# Altium PCB nest_jtag_serial.PcbDoc
Units mil, origin at the board's own origin, x right, y up, seen from the top; angles counter-clockwise.
Board outline 2025 x 2210 mil, 2 copper layers (Top Layer, Bottom Layer); 7 components, 18 nets, 94 pads, 58 vias.
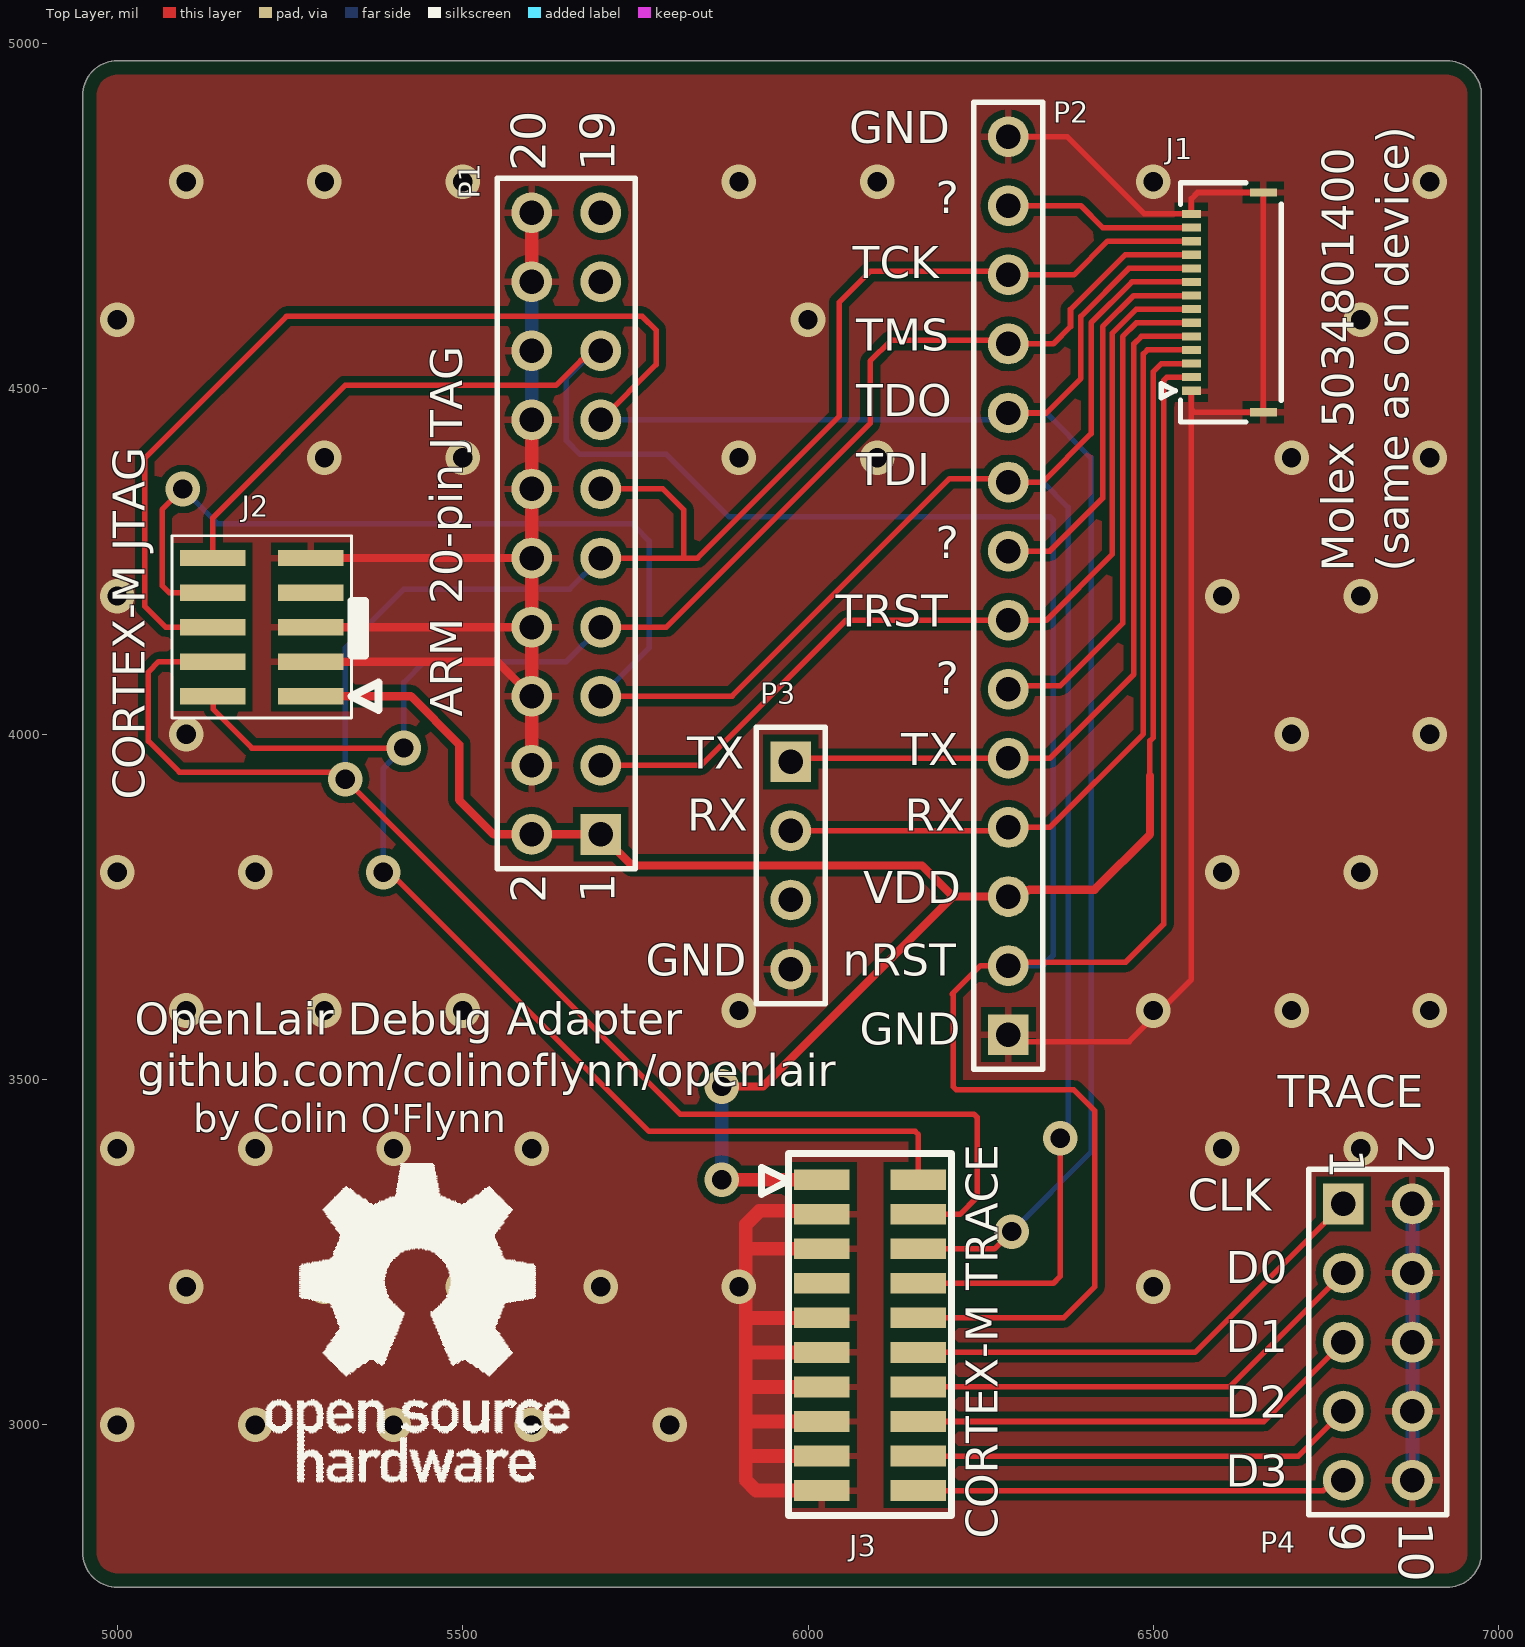
[diagram p0: Top Layer view]
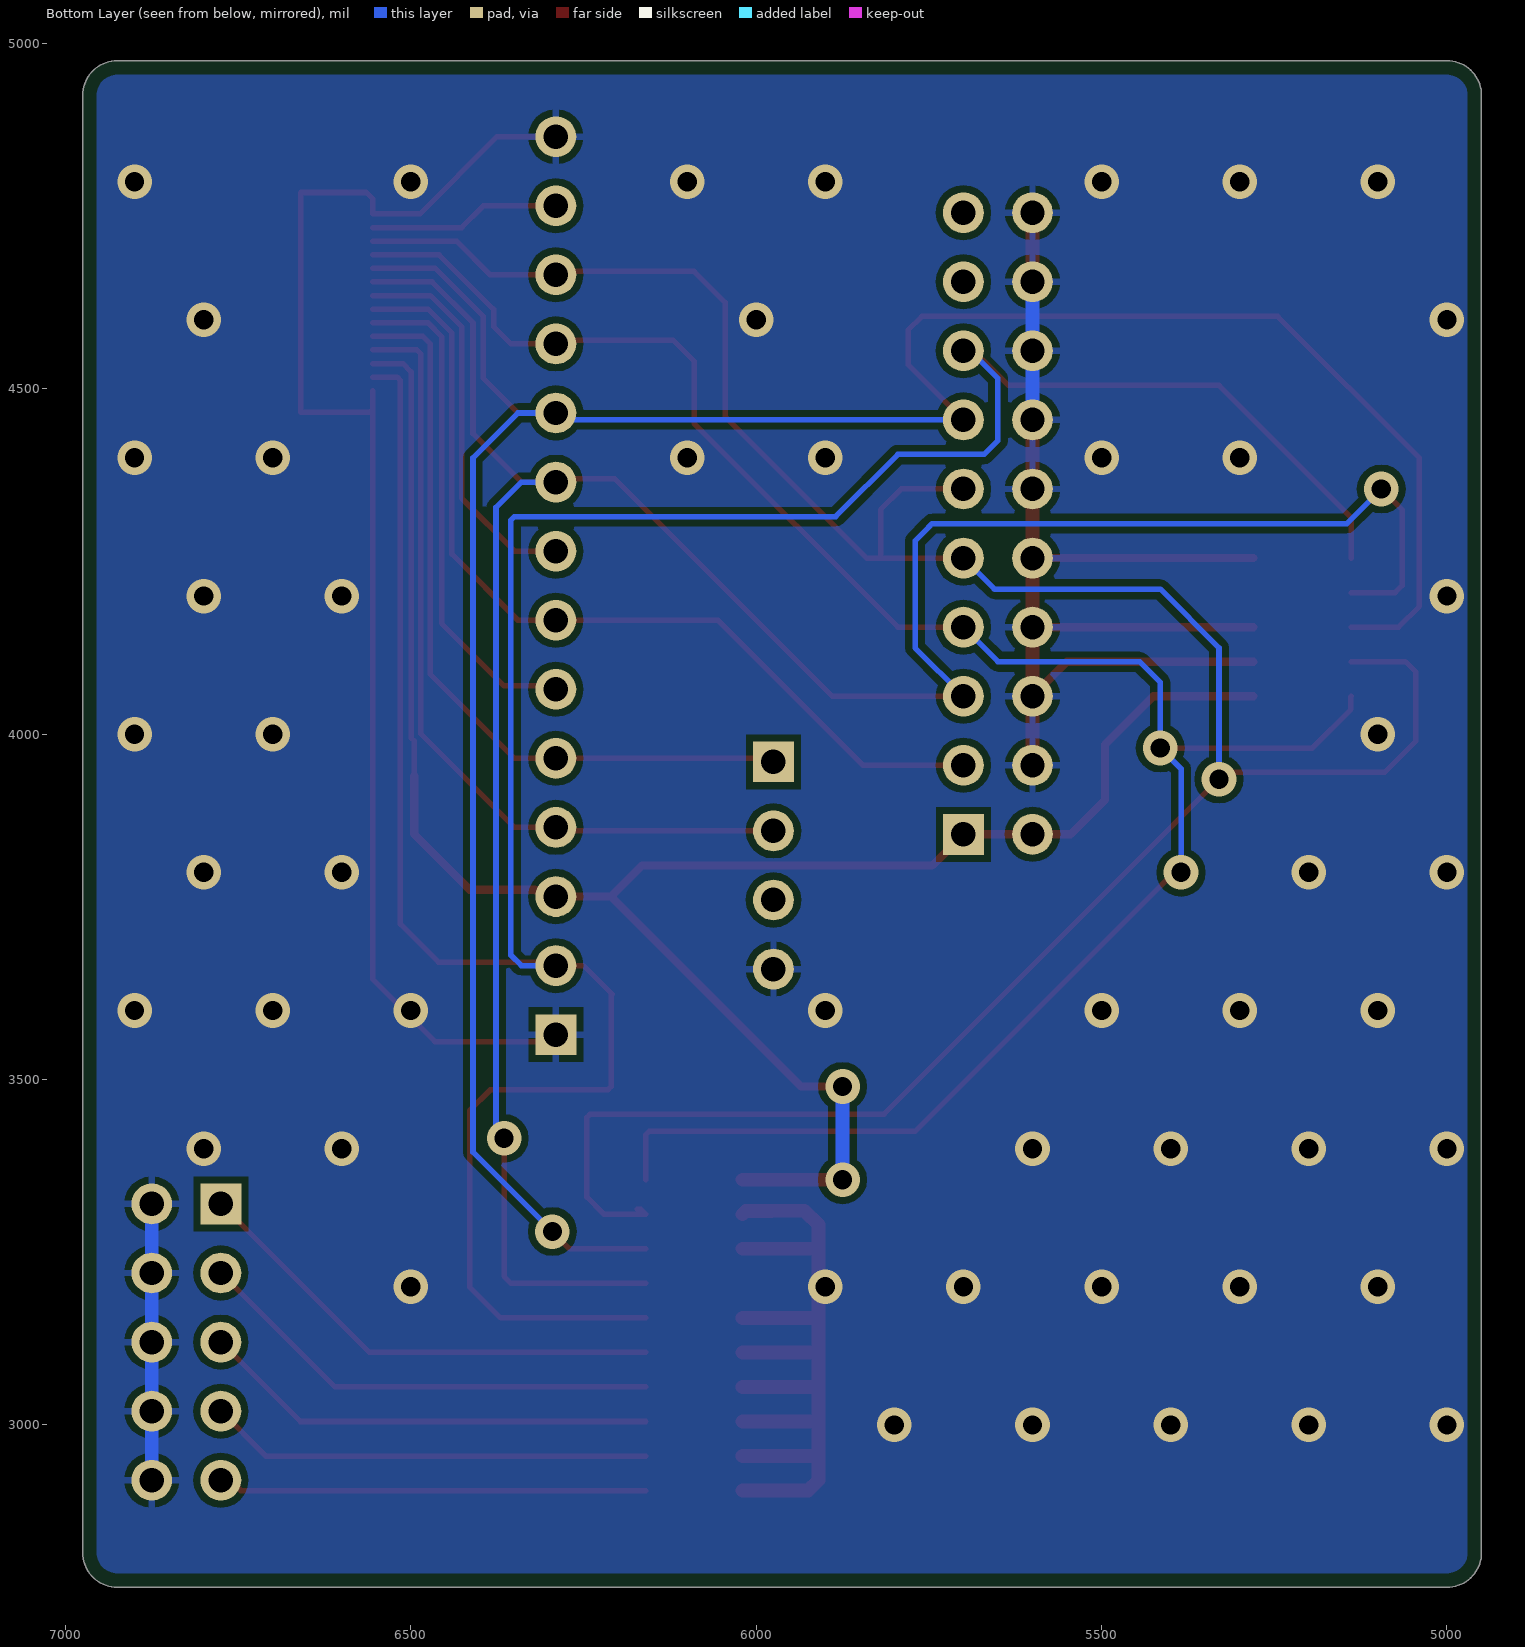
[diagram p1: Bottom Layer view, seen from below]

## Layer stack, top to bottom
Top Solder: solder mask 0.4, Solder Resist, Dk 3.5
Top Layer: signal copper 1.4
Dielectric 1: dielectric 12.6, FR-4, Dk 4.8
Bottom Layer: signal copper 1.4
Bottom Solder: solder mask 0.4, Solder Resist, Dk 3.5

## Board outline
4950,2815 ccw(c5000,2815) 5000,2765 6925,2765 ccw(c6925,2815) 6975,2815 6975,4925 ccw(c6925,4925) 6925,4975 5000,4975 ccw(c5000,4925) 4950,4925

## Design rules (kind name [scope] priority, off if disabled: settings)
BoardOutlineClearance Silk_to_Outline [(OnLayer('Top Overlay'))] p1: gap=0 ignorepadtopadclearanceinfootprint=FALSE
BoardOutlineClearance [All] p2: gap=20 ignorepadtopadclearanceinfootprint=FALSE
Clearance Clearance_Power [InNet('+*') OR InNet('-*') OR InNet('GND')] p1: gap=10 ignorepadtopadclearanceinfootprint=FALSE
Clearance [All] p2: gap=6 ignorepadtopadclearanceinfootprint=FALSE except(0: Arc-Hole Track-Hole SMDPad-Hole THPad-Hole Via-Hole Fill-Hole Poly-Hole Region-Hole Text-Hole)
HoleSize [All] p1: absolutevalues=TRUE maxlimit=200 minlimit=1 maxpercent=80.000 minpercent=20.000
MinimumSolderMaskSliver [All] p1: minsoldermaskwidth=5
PlaneConnect PlaneConnect_viaDirect [IsVia] p1: planeconnectstyle=Direct reliefexpansion=20 reliefentries=4 reliefconductorwidth=10 reliefairgap=10
PlaneConnect [All] p2: planeconnectstyle=Relief reliefexpansion=20 reliefentries=4 reliefconductorwidth=10 reliefairgap=10
PolygonConnect PolygonConnect_viaDirect [All vs isVia] p1: connectstyle=Direct reliefconductorwidth=10 reliefentries=4 polygonreliefangle="90 Angle" airgapwidth=10
PolygonConnect [All] p2: connectstyle=Relief reliefconductorwidth=10 reliefentries=4 polygonreliefangle="90 Angle" airgapwidth=10
RoutingVias [All] p1: holewidth=28 width=50 viastyle="Through Hole" minholewidth=28 minwidth=50 maxholewidth=28 maxwidth=50
SilkToSilkClearance [All] p1: silktosilkclearance=5
SilkToSolderMaskClearance [IsPad] p1: minsilkscreentomaskgap=5 clearancetoexposedcopper=TRUE
SolderMaskExpansion [All] p1: expansion=4
Width [All] p1: maxlimit=100 minlimit=6 preferedwidth=8 minimp=50.000000 maximp=50.000000 favimp=50.000000
25 further rules are at their usual default settings.

## Classes and differential pairs
component class nest_jtag_serial: J1 J2 J3 P1 P2 P3

## Components (designator, comment, footprint, x,y, rotation, side; value= is the part's Value field where it differs from the comment)
J1 "5034801400" FFC_14pin_5034801400 6555,4625.16 r90 top
J2 "10 Pin Cortex Program & Debug" 0.5mm_SMD_Header_5x2 5280,4055 r180 top
J3 "1296-T20" 1296-T20 6089.88,3255 r270 top
P1 "Header 10X2" HDR2X10 5700,3855 r90 top
P2 "Header 14" HDR1X14 6290,3565 r90 top
P3 "Header 4" HDR1X4 5975,3960 r270 top
P4 "Header 5X2" HDR2X5 6775,3320 r270 top

## Footprints (in the part's own frame and the unit in brackets; to place one, negate y for a bottom-side part, rotate by r counter-clockwise, add the part's x,y. Pads: shape width x height; smd on the part's side, far side on the other; paste and mask are expansions set on the pad)
0.5mm_SMD_Header_5x2 [mm]
  rect 2.4x0.6 smd: 1(0,0) 2(3.6,0) 3(0,-1.27) 4(3.6,-1.27) 5(0,-2.54) 6(3.6,-2.54) 8(3.6,-3.81) 9(0,-5.08) 10(3.6,-5.08)
  rect 2.4x0.6 smd paste-10 mask-10: 7(0,-3.81)
  silkscreen extent -2.5,-5.9 5.1,0.8, body extent -1.12,-5.71 4.72,0.64, height 6.11
1296-T20 [mm] "1.27mm x 20-pin"
  rect 0.76x2.05 smd: 1(-2.54,-1.775) 2(-2.54,1.775) 3(-1.27,-1.775) 4(-1.27,1.775) 5(0,-1.775) 6(0,1.775) 7(1.27,-1.775) 8(1.27,1.775) 9(2.54,-1.775) 10(2.54,1.775) 11(3.81,-1.775) 12(3.81,1.775) 13(5.08,-1.775) 14(5.08,1.775) 15(6.35,-1.775) 16(6.35,1.775) 17(7.62,-1.775) 18(7.62,1.775) 19(8.89,-1.775) 20(8.89,1.775)
  silkscreen extent -3.5,-4 9.8,3
FFC_14pin_5034801400 [mm] "FFC, 14 pin, 0.5mm, Molex 5034801400"
  rect 0.3x0.7 smd: 1(-3.25,0) 2(-2.75,0) 3(-2.25,0) 4(-1.75,0) 5(-1.25,0) 6(-0.75,0) 7(-0.25,0) 8(0.25,0) 9(0.75,0) 10(1.25,0) 11(1.75,0) 12(2.25,0) 13(2.75,0) 14(3.25,0)
  rect 0.3x1 smd: S(-4.04,-2.65) S(4.04,-2.65)
  silkscreen extent -4.4,-3.3 4.4,1.1, body extent -4.35,-3.3 4.35,0.3, height 1.88
HDR1X4 [mm] "Connector; Header; 4 Position"
  rect 1.5x1.5 hole 0.9: 1(0,0)
  round 1.5 hole 0.9: 2(2.54,0) 3(5.08,0) 4(7.62,0)
  silkscreen extent -1.27,-1.27 8.89,1.27
HDR1X14 [mm] "Connector; Header; 14 Position"
  rect 1.5x1.5 hole 0.9: 1(0,0)
  round 1.5 hole 0.9: 2(2.54,0) 3(5.08,0) 4(7.62,0) 5(10.16,0) 6(12.7,0) 7(15.24,0) 8(17.78,0) 9(20.32,0) 10(22.86,0) 11(25.4,0) 12(27.94,0) 13(30.48,0) 14(33.02,0)
  silkscreen extent -1.27,-1.27 34.29,1.27
HDR2X5 [mm] "Connector; Header; 5x2 Position"
  rect 1.5x1.5 hole 0.9: 1(0,0)
  round 1.5 hole 0.9: 2(0,2.54) 3(2.54,0) 4(2.54,2.54) 5(5.08,0) 6(5.08,2.54) 7(7.62,0) 8(7.62,2.54) 9(10.16,0) 10(10.16,2.54)
  silkscreen extent -1.27,-1.27 11.43,3.81
HDR2X10 [mm] "Connector; Header; 10x2 Position"
  rect 1.5x1.5 hole 0.9: 1(0,0)
  round 1.5 hole 0.9: 2(0,2.54) 3(2.54,0) 4(2.54,2.54) 5(5.08,0) 6(5.08,2.54) 7(7.62,0) 8(7.62,2.54) 9(10.16,0) 10(10.16,2.54) 11(12.7,0) 12(12.7,2.54) 13(15.24,0) 14(15.24,2.54) 15(17.78,0) 16(17.78,2.54) 17(20.32,0) 18(20.32,2.54) 19(22.86,0) 20(22.86,2.54)
  silkscreen extent -1.27,-1.27 24.13,3.81

## Part data
J1: "CONN FFC FPC 14POS 0.50MM R/A", Manufacture 1="Molex LLC", Supplier Part Number 1=WM1442CT-ND, Component Group=Connector, Component Type=Standard, Manufacture Part Number 1=5034801400, Part Number=5034801400, Pin Count=16, PP Material Stack=0, PP Rotation=0, Supplier 1=Digi-Key
J2: library part Cortex_Debug_Header_10Pin, "10 Pin Cortex Program & Debug 0.5mm pitch", Manufacture 1="Samtec Inc", Manufacture Part Number 1=FTSH-105-01-L-DV-007-K, Supplier Part Number 1=SAM9438-ND, Component Group=Connector, Component Type=Standard, Mounting Technology=SMT, Part Number=Cortex_Debug_Header_10Pin, Pin Count=10, PP Material Stack=0, PP Rotation=0, RoHS=Yes, Supplier 1=Digi-Key
J3: "Header, 20-pin, SMD, 0.05\"", Component Group=Connector, Component Type=Standard, Mounting Technology=SMT, Part Number=1296-T20, Pin Count=20
P1: "Header, 10-Pin, Dual row", LatestRevisionDate=17-Jul-2002, LatestRevisionNote="Re-released for DXP Platform.", Publisher="Altium Limited"
P2: "Header, 14-Pin", LatestRevisionDate=17-Jul-2002, LatestRevisionNote="Re-released for DXP Platform.", Publisher="Altium Limited"
P3: "Header, 4-Pin", LatestRevisionDate=17-Jul-2002, LatestRevisionNote="Re-released for DXP Platform.", Publisher="Altium Limited"
P4: "Header, 5-Pin, Dual row", LatestRevisionDate=17-Jul-2002, LatestRevisionNote="Re-released for DXP Platform.", Publisher="Altium Limited"

## Via types
v1: diameter 50, hole 28, Top Layer to Bottom Layer, tented both sides, 58 vias

## Nets (pads, with @x,y where several pads share a name; then routed paths per layer and width w, separated by ;. In a path a pad name is that pad's centre, name@x,y a point inside that pad or via, vN(x,y) a via of type N, cw(c..) or ccw(c..) an arc to the next point about the centre after c; other vN are vias at no path point)
GND: J1.1 J1.14 J1.S J2.3 J2.5 J2.9 J3.3 J3.5 J3.9 J3.11 J3.13 J3.15 J3.17 J3.19 P1.4 P1.6 P1.8 P1.10 P1.12 P1.14 P1.16 P1.18 P1.20 P2.1 P2.14 P3.4 P4.2 P4.4 P4.6 P4.8 P4.10 | length 5473.2
  Top Layer w8: P2.1 6300,3555 6465,3555 6555,3645 6555,4470 ; P2.14 6375,4865 6486.89,4753.11 J1.14 ; J1.1 6555,4470 ; J1.14@6555,4753.33 6555,4775 6564.21,4784.21 6659.33,4784.21 6659.33,4466.1 6558.9,4466.1 6555,4470
  Top Layer w12: J2.3 5550,4105 P1.6 ; J2.5 P1.8 ; J2.9 P1.10
  Top Layer w20: P1.4 P1.6 P1.8 P1.10 P1.12 P1.14 ; P1.18 P1.20 ; J3.19 5925,2905 5910,2920 5910,2950 ; J3.17 5915,2955 5910,2950 ; J3.15 5910,3005 ; J3.13 5910,3055 ; J3.11 5910,3105 ; J3.9 5910,3155 ; J3.5 5910,3255 ; J3.3 6015.04,3309.96 5977.97,3309.96 5977.93,3310 5930,3310 5910,3290 5910,3255 ; 5910,2950 5910,3005 ; 5910,3005 5910,3055 ; 5910,3055 5910,3105 ; 5910,3105 5910,3155 ; 5910,3155 5910,3255
  Bottom Layer w20: P1.14 P1.16 P1.18 ; P4.10 P4.8 P4.6 P4.4 P4.2
  other v1: 5000,3000 5200,3000 5400,3000 5600,3000 5800,3000 5100,3200 5300,3200 5500,3200 5700,3200 5900,3200 6500,3200 5000,3400 5200,3400 5400,3400 5600,3400 6600,3400 6800,3400 5100,3600 5300,3600 5500,3600 5900,3600 6500,3600 6700,3600 6900,3600 5000,3800 5200,3800 6600,3800 6800,3800 5100,4000 6700,4000 6900,4000 5000,4200 6600,4200 6800,4200 5300,4400 5500,4400 5900,4400 6100,4400 6700,4400 6900,4400 5000,4600 6000,4600 6800,4600 5100,4800 5300,4800 5500,4800 5900,4800 6100,4800 6500,4800 6900,4800
NetJ1_6: J1.6 P2.6 | length 728
  Top Layer w8: P2.6 6295,4070 6365,4070 6455.37,4160.37 6455.37,4575.57 6475.43,4595.63 J1.6
NetJ1_8: J1.8 P2.8 | length 563.8
  Top Layer w8: P2.8 6350,4265 6426.57,4341.57 6426.57,4590 6471.57,4635 J1.8
NetJ1_13: J1.13 P2.13 | length 278.1
  Top Layer w8: P2.13 6395,4765 6426.57,4733.43 J1.13
nRST: J1.2 J2.10 J3.10 P1.15 P2.2 | length 4390.7
  Top Layer w8: J2.10 5138.27,4313.27 5330,4505 5635,4505 5671.14,4541.14 5672.32,4541.14 5686.18,4555 P1.15 ; J3.10 6370,3155 6415,3200 6415,3455 6385,3485 6214.69,3485 6210,3489.69 6210,3622.43 6208.72,3623.72 6250,3665 P2.2 6295,3670 6460,3670 6515,3725 6515,4512.2 6519.69,4516.89 J1.2
  Bottom Layer w8: P1.15 5690,4555 5650,4515 5650,4425 5670,4405 5795,4405 5885,4315 6350,4315 6355,4310 6355,3680 6340,3665 P2.2
RX: J1.4 P2.4 P3.2 | length 1190.6
  Top Layer w8: P3.2 6285,3860 P2.4 6350,3865 6485.57,4000.57 6485.57,4550.57 6491.26,4556.26 J1.4
TCK: J1.12 J2.4 J3.4 P1.9 P1.11 P2.12 | length 3816.9
  Top Layer w8: J2.4 5060,4105 5045,4090 5045,3990 5090,3945 5325.31,3945 5330,3940.31 v1(5330,3935) 5815,3450 6240.31,3450 6245,3445.31 6245,3330 6220,3305 J3.4 6167.2,3312.43 J3.4@6172.43,3312.43 ; P1.9 5820,4255 ; P1.11 5790,4355 5820,4325 5820,4255 ; J1.12 6433.74,4713.74 6385,4665 P2.12 6285,4670 6090,4670 6045,4625 6045,4460 5840,4255 5820,4255
  Bottom Layer w8: v1(5330,3935) 5330,4125 5415,4210 5655,4210 P1.9
TDI: J1.9 J2.8 J3.8 P1.5 P2.9 | length 3821.1
  Top Layer w8: v1(5095,4355) 5065,4325 5065,4215 5075,4205 J2.8 ; P1.5 5890,4055 6205,4370 6285,4370 P2.9 6340,4365 6410,4435 6410,4595.63 6469.06,4654.69 J1.9 ; J3.8 6355,3205 6365,3215 v1(6365,3415)
  Bottom Layer w8: v1(5095,4355) 5145,4305 5745.31,4305 5750,4300.31 5750,4300 5770,4280 5770,4125 P1.5 ; P2.9 6340,4365 6376.69,4328.31 6376.69,3426.69 v1(6365,3415)
TDO: J1.10 J2.6 J3.6 P1.13 P2.10 | length 3780.8
  Top Layer w8: J2.6 5070,4155 5040,4185 5040,4400 5245,4605 5760,4605 5780,4585 5780,4535 P1.13 ; J3.6 6270,3255 v1(6295,3280) ; P2.10 6345,4465 6395,4515 6395,4605 6464.37,4674.37 J1.10
  Bottom Layer w8: P1.13 6266.18,4455 6276.18,4465 P2.10 6345,4465 6410,4400 6410,3395 v1(6295,3280)
TMS: J1.11 J2.2 J3.2 P1.7 P2.11 | length 3071.2
  Top Layer w8: J2.2 5139.12,4054.14 5139.12,4035.88 5195,3980 v1(5415,3980) ; v1(5385,3800) 5390,3795 5400,3795 5770,3425 6155.08,3425 6159.76,3420.31 J3.2 ; P1.7 5795,4155 6090,4450 6090,4540 6120,4570 6285,4570 P2.11 6355,4565 6380,4590 6380,4615 6459.06,4694.06 J1.11
  Bottom Layer w8: v1(5385,3800) 5385,3950 v1(5415,3980) 5415,4075 5445,4105 5650,4105 P1.7
TRACECLK: J3.12 P4.1 | length 704.3
  Top Layer w8: J3.12 6560,3105 P4.1
TRACEDATA0: J3.14 P4.3 | length 683.6
  Top Layer w8: J3.14 6610,3055 P4.3
TRACEDATA1: J3.16 P4.5 | length 662.9
  Top Layer w8: J3.16 6660,3005 P4.5
TRACEDATA2: J3.18 P4.7 | length 642.2
  Top Layer w8: J3.18 6710,2955 P4.7
TRACEDATA3: J3.20 P4.9 | length 621.4
  Top Layer w8: J3.20 6746.18,2905 6761.18,2920 P4.9
TRST: J1.7 P1.3 P2.7 | length 1316
  Top Layer w8: P1.3 5845,3955 6055,4165 P2.7 6345,4165 6440.57,4260.57 6440.57,4580.57 6475.31,4615.31 J1.7
TX: J1.5 P2.5 P3.1 | length 1115.4
  Top Layer w8: P3.1 5980,3965 P2.5 6350,3965 6471.57,4086.57 6471.57,4565 6482.52,4575.94 J1.5
VDD: J1.3 J2.1 J3.1 P1.1 P1.2 P2.3 | length 2880
  Top Layer w8: 6495,3940 6495,3990.2 6499.57,3994.78 6499.57,4524.57 6511.57,4536.57 J1.3
  Top Layer w12: J2.1 5425,4055 5495,3985 5495,3905 5545,3855 P1.2 P1.1 5745,3810 6165,3810 6210,3765 ; v1(5875,3490) 5935,3490 6210,3765 ; 6495,3940 6495,3855 6415,3775 6320.56,3775 6319.56,3774 6299,3774 P2.3 6210,3765
  Top Layer w20: v1(5875,3355) J3.1
  Bottom Layer w20: v1(5875,3355) v1(5875,3490)
pads on no net: J2.7 J3.7 P1.17 P1.19 P3.3

## Polygon pours and split planes (outlines as drawn)
GND on Top Layer "GND_L01_P000" (solid, remove dead copper, pour order 0): 4855,5080 4865,5070 7075,5070 7075,2715 6895,2535 4815,2595
GND on Bottom Layer "GND_L02_P002" (solid, remove dead copper, pour order 2): 4870,5075 4880,5065 7090,5065 7090,2710 6910,2530 4830,2590

## Silkscreen, mask and mechanical layers (free items; w line width, h text height)
Top Overlay:
  drawing of 18 lines, arcs and shapes, not listed
  text "GND" at 6060,4840 h80
  text "?" at 6185,4740 h80
  text "TCK" at 6065,4645 h80
  text "TMS" at 6070,4540 h80
  text "TDO" at 6070,4445 h80
  text "TDI" at 6070,4345 h80
  text "?" at 6185,4240 h80
  text "Molex 5034801400 / (same as on device)" at 6885,4235 h80 r90
  text "TRST" at 6040,4140 h80
  text "?" at 6185,4044 h80
  text "ARM 20-pin JTAG" at 5515,4025.13 h80 r90
  text "TX" at 6135,3940 h80
  text "TX" at 5825,3935 h80
  text "CORTEX-M JTAG" at 5055,3905 h80 r90
  text "RX" at 5825,3845 h80
  text "RX" at 6140,3845 h80
  text "VDD" at 6080,3740 h80
  text "GND" at 5765,3635 h80
  text "nRST" at 6050,3635 h80
  text "OpenLair Debug Adapter" at 5025,3550 h80
  text "GND" at 6075,3535 h80
  text "github.com/colinoflynn/openlair" at 5030,3475 h80
  text "TRACE" at 6680,3445 h80
  text "by Colin O'Flynn" at 5110,3410 h70
  text "CLK" at 6550,3295 h80
  text "D0" at 6605,3190 h80
  text "D1" at 6605,3090 h80
  text "D2" at 6605,2995 h80
  text "D3" at 6605,2895 h80
  text "CORTEX-M TRACE" at 6290,2835 h80 r90
Mechanical 1:
  lines w10: 4950,2815 ccw(c5000,2815) 5000,2765 6925,2765 ccw(c6925,2815) 6975,2815 6975,4925 ccw(c6925,4925) 6925,4975 5020,4975 5000,4975 ccw(c5000,4925) 4950,4925 4950,2815

## Text inside footprints (layer, text, board x,y; h text height)
P1: Top Overlay "20" at 5620,4815 h50 r90; Top Overlay "19" at 5720,4815 h50 r90; Top Overlay "1" at 5720,3755 h50 r90; Top Overlay "2" at 5620,3755 h50 r90
P4: Top Overlay "10" at 6855,2860 h50 r270; Top Overlay "9" at 6755,2860 h50 r270; Top Overlay "1" at 6755,3400 h50 r270; Top Overlay "2" at 6855,3420 h50 r270